# Altium PCB PCB1.PcbDoc
Units mil, origin at the board's own origin, x right, y up, seen from the top; angles counter-clockwise.
Board outline 7615 x 5380 mil, 2 copper layers (Top Layer, Bottom Layer); 49 components, 64 nets, 232 pads, 0 vias.
Unrouted connection lines stored in the file: 10.
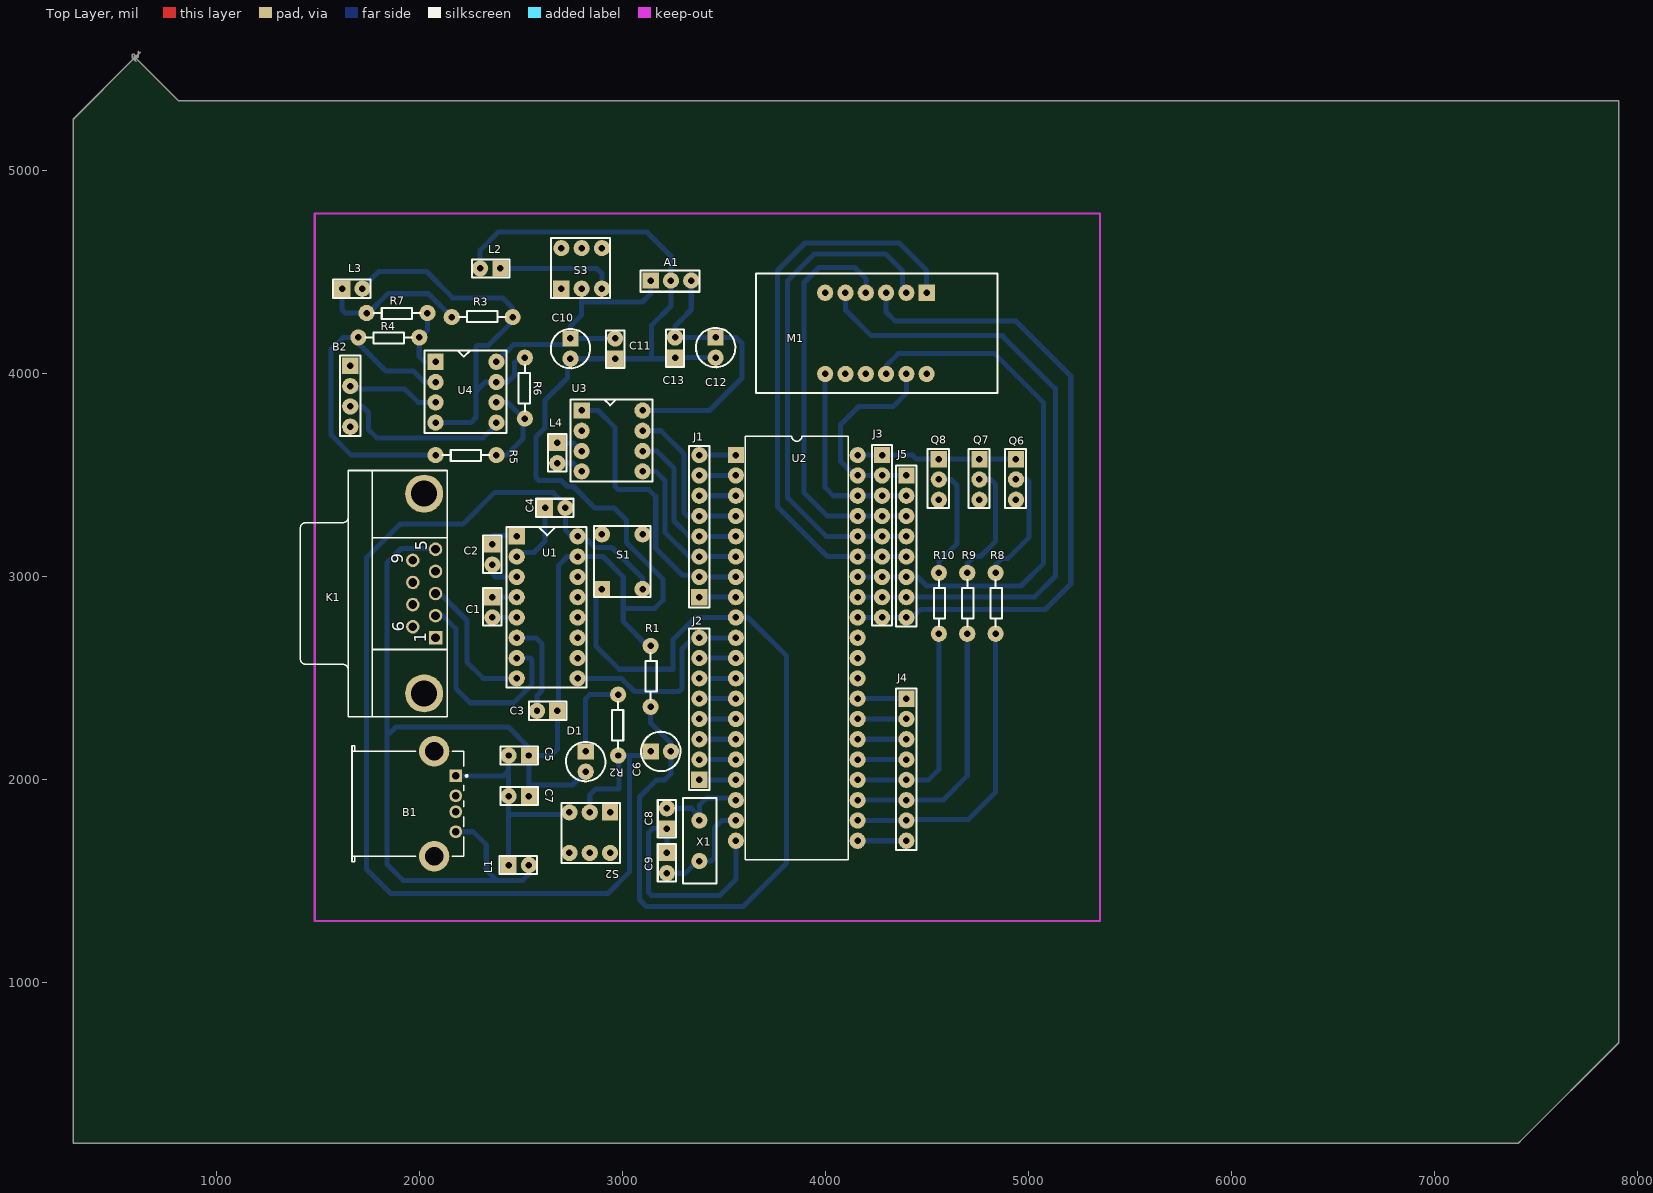
[diagram p0: Top Layer view]
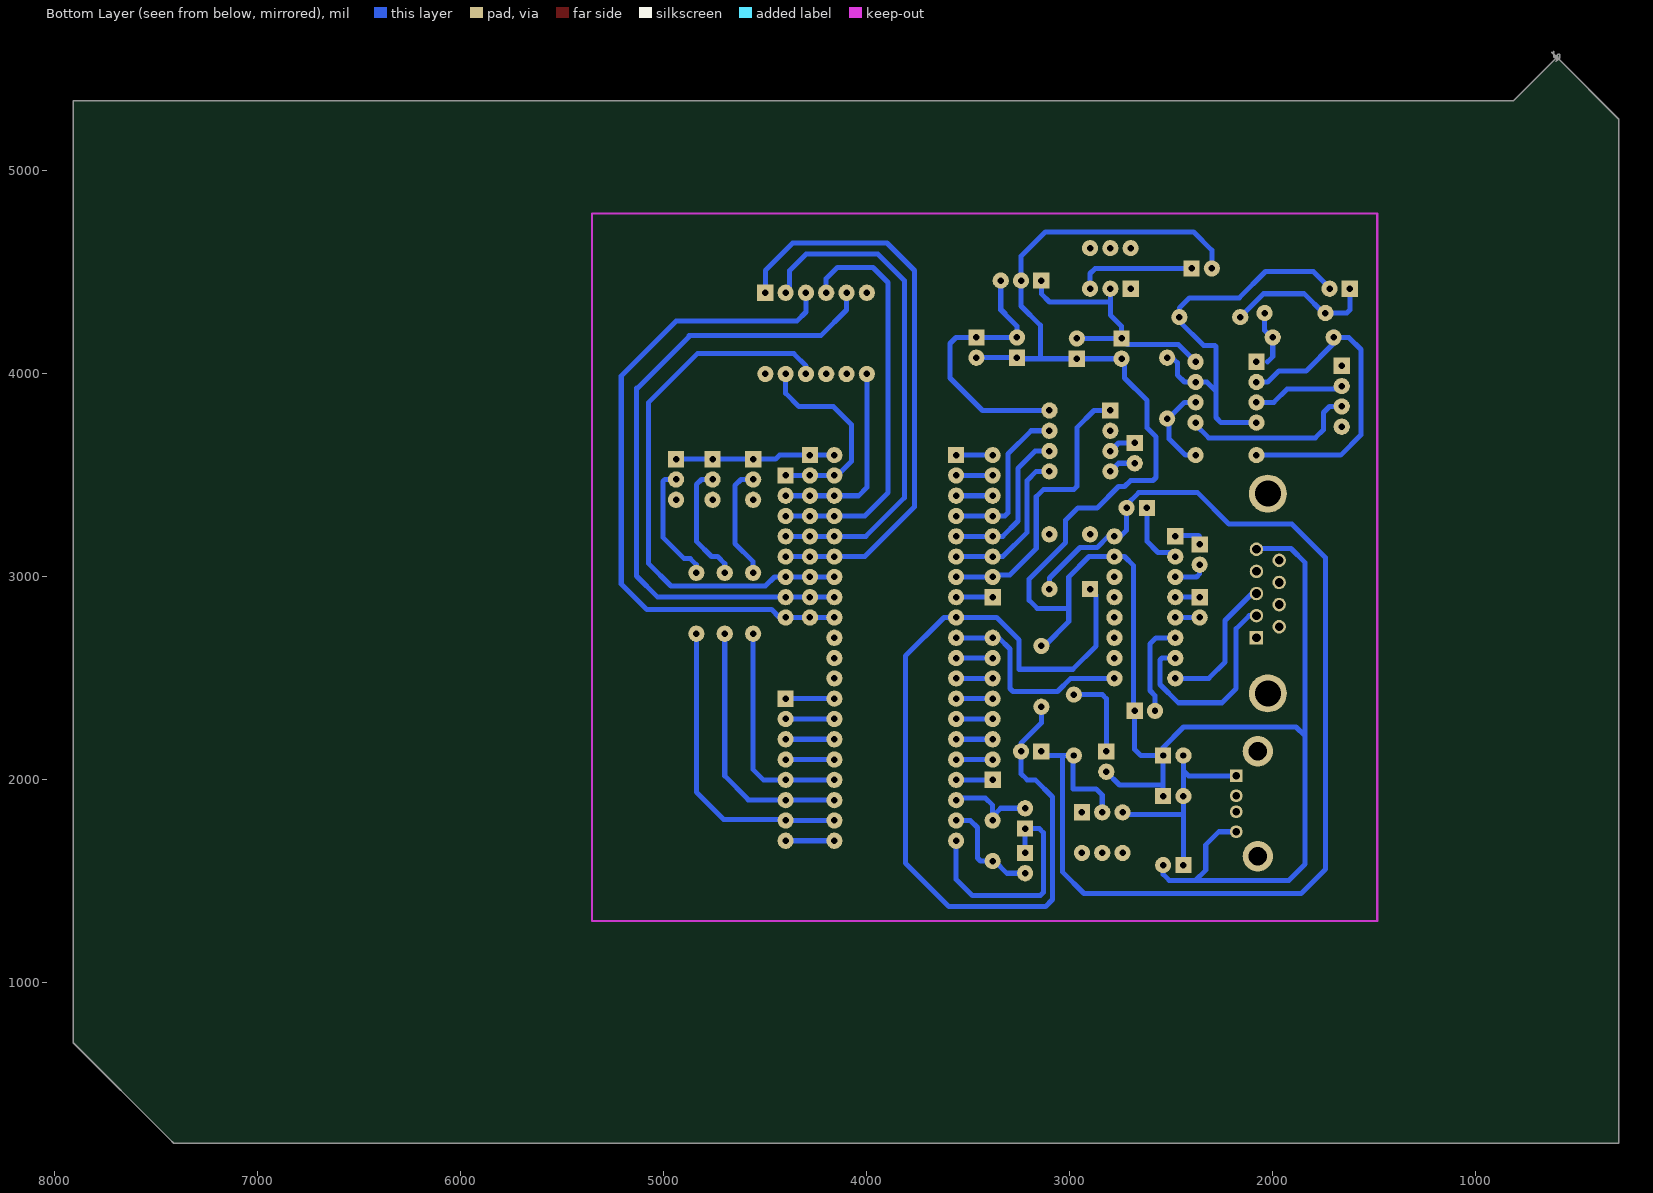
[diagram p1: Bottom Layer view, seen from below]

## Layer stack, top to bottom
Top Layer: signal copper 1.4
Dielectric: core 12.6, FR-4, Dk 4.8
Bottom Layer: signal copper 1.4

## Board outline
595,5565 815,5345 7910,5345 7910,705 7435,230 7415,210 295,210 295,5255 595,5555 595,5545 595,5555 625,5585 595,5555 605,5555 615,5565 615,5590 615,5575 595,5555 585,5555 585,5575 595,5575 600,5570 600,5560 595,5565 595,5550 605,5540 600,5545 600,5560 615,5560

## Design rules (kind name [scope] priority, off if disabled: settings)
Clearance [All] p1: gap=10
ComponentClearance [All] p1 off: gap=10 collisioncheckmode=3 verticalgap=10
PolygonConnect [All] p1: connectstyle=Relief reliefconductorwidth=10 reliefentries=4 polygonreliefangle="90 Angle"
RoutingVias [All] p1: holewidth=28 width=50 viastyle="Through Hole" minholewidth=28 minwidth=50 maxholewidth=28 maxwidth=50
SolderMaskExpansion [All] p1: expansion=4
TestPointUsage [All] p1: valid=0 allowmultiple=FALSE
Testpoint [All] p1: side=15 testpointundercomponent=TRUE minsize=40 maxsize=100 preferedsize=60 minholesize=0 maxholesize=40 preferedholesize=32 testpointgrid=1 style=1023 order=0-112345678
Width [All] p1: maxlimit=25 minlimit=25 preferedwidth=25
18 further rules are at their usual default settings.

## Components (designator, comment, footprint, x,y, rotation, side; value= is the part's Value field where it differs from the comment)
A1 "7805" P-3 3140,4460 r90 top
B1 "USB" USB 2180,2020 r180 top
B2 "传感器" P-4 1660,4040 r0 top
C1 "104" P-2 2360,2900 r0 top
C2 "104" P-2 2360,3160 r0 top
C3 "104" P-2 2680,2340 r270 top
C4 "104" P-2 2620,3340 r90 top
C5 "10uf" P-2 2540,2120 r270 top
C6 "10UF" P-2有源 3140,2140 r90 top
C7 "104" P-2 2540,1920 r270 top
C8 "30P" P-2 3220,1760 r180 top
C9 "30P" P-2 3220,1640 r0 top
C10 "22UF" P-2有源 2745,4175 r0 top
C11 "104" P-2 2965,4075 r180 top
C12 "22UF" P-2有源 3460,4180 r0 top
C13 "104" P-2 3260,4080 r180 top
D1 "HLMA-PH00-N0014" P-2有源 2820,2140 r0 top
J1 "P-8" P-8 3380,2900 r180 top
J2 "P-8" P-8 3380,2000 r180 top
J3 "排阻" P-9 4280,3600 r0 top
J4 "P-8" P-8 4400,2400 r0 top
J5 "P-8" P-8 4400,3500 r0 top
K1 "串口" 串口 2080,2700 r90 top
L1 "5v外接" P-2 2440,1580 r90 top
L2 "12v外接电源" P-2 2400,4520 r270 top
L3 "12v外接电源" P-2 1620,4420 r90 top
L4 "12v外接电源" P-2 2680,3660 r0 top
M1 "数码管" 数码管 4500,4400 r180 top
Q6 "8550" P-3 4940,3580 r0 top
Q7 "8550" P-3 4760,3580 r0 top
Q8 "8550" P-3 4560,3580 r0 top
R1 "10K" 电阻 3140,2660 r0 top
R2 "1k" 电阻 2980,2120 r180 top
R3 "10k" 电阻 2160,4280 r90 top
R4 "51k" 电阻 2000,4180 r270 top
R5 "330" 电阻 2380,3600 r270 top
R6 "51k" 电阻 2520,3780 r180 top
R7 "10k" 电阻 2040,4300 r270 top
R8 "4.7K" 电阻 4840,3020 r0 top
R9 "4.7K" 电阻 4700,3020 r0 top
R10 "4.7K" 电阻 4560,3020 r0 top
S1 "SW-PB" 按键 2900,2940 r0 top
S2 "SW-SPST" "LOCK KEY" 2940,1840 r180 top
S3 "SW-SPST" "LOCK KEY" 2700,4420 r0 top
U1 "MAX232" DIP-16 2480,3200 r0 top
U2 "89C52" 单片机 3560,3600 r180 top
U3 "ADC0832" DIP-8 2800,3820 r0 top
U4 "358" DIP-8 2080,4060 r0 top
X1 "晶振" 晶振 3380,1800 r0 top

## Footprints (in the part's own frame and the unit in brackets; to place one, negate y for a bottom-side part, rotate by r counter-clockwise, add the part's x,y. Pads: shape width x height; smd on the part's side, far side on the other; paste and mask are expansions set on the pad)
DIP-8 [mil]
  rect 80x80 hole 32: 1(0,0)
  round 80 hole 32: 2(0,-100) 3(0,-200) 4(0,-300) 5(300,-300) 6(300,-200) 7(300,-100) 8(300,0)
  silkscreen extent -55,-350 350,55
DIP-16 [mil]
  rect 80x80 hole 32: 1(0,0)
  round 80 hole 32: 2(0,-100) 3(0,-200) 4(0,-300) 5(0,-400) 6(0,-500) 7(0,-600) 8(0,-700) 9(300,-700) 10(300,-600) 11(300,-500) 12(300,-400) 13(300,-300) 14(300,-200) 15(300,-100) 16(300,0)
  silkscreen extent -50,-745 345,45
"LOCK KEY" [mil]
  round 80 hole 32: 1(200,0) 2(100,0) 4(200,200) 5(100,200) 6(0,200)
  rect 80x80 hole 32: 3(0,0)
  silkscreen extent -50,-45 240,250
P-2 [mil]
  rect 80x80 hole 32: 1(0,0)
  round 80 hole 32: 2(0,-100)
  silkscreen extent -45,-140 45,45
P-2有源 [mil]
  rect 80x80 hole 32: 1(0,0)
  round 80 hole 32: 2(0,-100)
  silkscreen extent -97,-147 97,47
P-3 [mil]
  rect 80x80 hole 32: 1(0,0)
  round 80 hole 32: 2(0,-100) 3(0,-200)
  silkscreen extent -55,-240 50,50
P-4 [mil]
  rect 80x80 hole 32: 1(0,0)
  round 80 hole 32: 2(0,-100) 3(0,-200) 4(0,-300)
  silkscreen extent -50,-345 50,50
P-8 [mil]
  rect 80x80 hole 32: 1(0,0)
  round 80 hole 32: 2(0,-100) 3(0,-200) 4(0,-300) 5(0,-400) 6(0,-500) 7(0,-600) 8(0,-700)
  silkscreen extent -50,-745 50,50
P-9 [mil]
  rect 80x80 hole 32: 1(0,0)
  round 80 hole 32: 2(0,-100) 3(0,-200) 4(0,-300) 5(0,-400) 6(0,-500) 7(0,-600) 8(0,-700) 9(0,-800)
  silkscreen extent -50,-840 50,50
USB [mm]
  rect 1.6x1.6 hole 0.92: 1(0,0)
  round 1.6 hole 0.92: 2(0,2.5) 3(0,4.5) 4(0,7)
  round 3.8 hole 2.3: 5(2.71,10.07) 6(2.71,-3.07)
  silkscreen extent -1.48,-3.75 12.99,10.75
串口 [mm]
  rect 1.69x1.69 hole 1.09: 1(0,0)
  round 1.69 hole 1.09: 2(2.77,0) 3(5.54,0) 4(8.31,0) 5(11.08,0) 6(1.385,2.84) 7(4.155,2.84) 8(6.925,2.84) 9(9.695,2.84)
  round 4.76 hole 3.26: 10(-6.955,1.42) 11(18.035,1.42)
  silkscreen extent -9.86,-1.48 20.94,16.92
单片机 [mil]
  rect 80x80 hole 32: 1(0,0)
  round 80 hole 32: 2(0,100) 3(0,200) 4(0,300) 5(0,400) 6(0,500) 7(0,600) 8(0,700) 9(0,800) 10(0,900) 11(0,1000) 12(0,1100) 13(0,1200) 14(0,1300) 15(0,1400) 16(0,1500) 17(0,1600) 18(0,1700) 19(0,1800) 20(0,1900) 21(-600,1900) 22(-600,1800) 23(-600,1700) 24(-600,1600) 25(-600,1500) 26(-600,1400) 27(-600,1300) 28(-600,1200) 29(-600,1100) 30(-600,1000) 31(-600,900) 32(-600,800) 33(-600,700) 34(-600,600) 35(-600,500) 36(-600,400) 37(-600,300) 38(-600,200) 39(-600,100) 40(-600,0)
  silkscreen extent -554,-93 -46,1993
按键 [mil]
  rect 80x80 hole 32: 1(0,0)
  round 80 hole 32: 2(200,0) 3(200,270) 4(0,270)
  silkscreen extent -40,-40 240,310
数码管 [mil]
  rect 80x80 hole 32: 1(0,0)
  round 80 hole 32: 2(100,0) 3(200,0) 4(300,0) 5(400,0) 6(500,0) 7(500,400) 8(400,400) 9(300,400) 10(200,400) 11(100,400) 12(0,400)
  silkscreen extent -350,-95 840,495
晶振 [mil]
  round 80 hole 32: 1(0,0) 2(0,-200)
  silkscreen extent -80,-310 85,110
电阻 [mil]
  round 80 hole 32: 1(0,0) 2(0,-300)
  silkscreen extent -25,-265 30,-35

## Part data
A1: library part P-3
B2: library part USB
C1 C2 C3 C4 C5 C7 C8 C9 C11 C13: library part Cap, "Capacitor"
C6 C10 C12: library part "Cap Pol1", "Polarized Capacitor (Radial)"
D1: "Subminiature High Performance AlInGaP Red/Orange LED Lamp"
J3: library part P-9
L1 L2 L3 L4: library part P-2
Q6 Q7 Q8: library part 2N3906, "PNP General Purpose Amplifier"
R1 R2 R3 R4 R5 R6 R7 R8 R9 R10: library part Res2, "Resistor"
S1: "Switch"
S2 S3: "Single-Pole, Single-Throw Switch"
U4: library part ADC0832

## Nets (pads, with @x,y where several pads share a name; then routed paths per layer and width w, separated by ;. In a path a pad name is that pad's centre, name@x,y a point inside that pad or via, vN(x,y) a via of type N, cw(c..) or ccw(c..) an arc to the next point about the centre after c; other vN are vias at no path point)
1: M1.12 Q8.3 | length 14.1
  Bottom Layer w25: M1.12@4490,3990 M1.12
2: M1.9 Q7.3
3: M1.8 Q6.3
+1: B2.2 U4.3 | length 453.1
  Bottom Layer w25: B2.2 1675,3925 1930,3925 1995,3860 U4.3
+2: B2.3 U4.5 | length 870.9
  Bottom Layer w25: B2.3 1720,3840 1750,3810 1750,3725 1790,3685 2315,3685 2380,3750 U4.5
A: J3.2 J5.1 M1.11 U2.39 | length 1017.3
  Bottom Layer w25: U2.39@4155,3490 4075,3570 4075,3750 4165,3840 4335,3840 4400,3905 M1.11 ; U2.39 J5.1
B: J3.3 J5.2 M1.7 U2.38 | length 976.6
  Bottom Layer w25: M1.7 4000,3440 4040,3400 J5.2
C: J3.4 J5.3 M1.4 U2.37 | length 2006.5
  Bottom Layer w25: M1.4 4200,4470 4145,4525 3970,4525 3895,4450 3895,3415 4010,3300 J5.3@4390,3300
D: J3.5 J5.4 M1.2 U2.36 | length 2504
  Bottom Layer w25: J5.4 4005,3200 3815,3390 3815,4460 3945,4590 4300,4590 4380,4510 4380,4420 M1.2
DP: J3.9 J5.8 M1.3 U2.32 | length 3249.8
  Bottom Layer w25: U2.32 J5.8 ; M1.3 4300,4305 4345,4260 4940,4260 5210,3990 5210,2965 5083.83,2838.83 4898.83,2838.83 4897.65,2840 4470,2840 J5.8@4430,2800
E: J3.6 J5.5 M1.1 U2.35 | length 2858.3
  Bottom Layer w25: J5.5 4010,3100 3765,3345 3765,4510 3900,4645 4365,4645 4500,4510 M1.1
F: J3.7 J5.6 M1.10 U2.34 | length 2713.5
  Bottom Layer w25: U2.34 4455,3000 4500,2955 4965,2955 5075,3065 5075,3860 4835,4100 4360,4100 4300,4040 M1.10
G: J3.8 J5.7 M1.5 U2.33 | length 3220.9
  Bottom Layer w25: M1.5 4100,4315 4225,4190 4875,4190 4875,4185 5130,3930 ; U2.33 5030,2900 5135,3005 5135,3930
GND: A1.2 B1.4 B2.4 C3.1 C5.1 C7.1 C8.1 C9.1 C10.2 C11.1 C12.2 C13.1 D1.2 K1.5 L1.2 L2.2 R1.1 U1.15 U2.20 | length 11479
  Bottom Layer w25: 1840,2215 1885,2260 2440,2260 2540,2160 C7.1 ; K1.5@2076.22,3140 1910,3140 1840,3070 1840,1585 1920,1505 2510,1505 2540,1535 L1.2 ; B1.4 2265.59,1744.41 2330,1680 2330,1555 2380,1505 ; L2.2 2300,4610 2390,4700 3120,4700 3240,4580 3240,4335 3145,4240 3145,4075 ; 2540,1975 2755,1975 D1.2 ; C5.1 2650,2120 2680,2150 C3.1 ; C3.1@2680,2335 2685,2340 2685,3055 2730,3100 2905,3100 3005,3000 3005,2780 3125,2660 R1.1 ; 3015,2845 3160,2845 3200,2885 3200,2990 3020,3170 3020,3280 2960,3340 2865,3340 2760,3445 2730,3445 2700,3475 2590,3475 2575,3490 2575,3690 2620,3735 2620,3870 2730,3980 2730,4060 C10.2 3255,4075 C13.1 C12.2 ; C9.1 C8.1 3150,1760 3130,1740 3130,1445 3145,1430 3480,1430 3560,1510 U2.20
NetB1_1: B1.1 C5.2 C7.2 L1.1 S2.1 | length 1100.4
  Bottom Layer w25: B1.1 2415,2020 2440,2045 ; L1.1 C5.2 ; 2440,1830 S2.1@2730,1830
NetC1_1: C1.1 U1.4 | length 120
  Bottom Layer w25: C1.1 U1.4
NetC1_2: C1.2 U1.5 | length 120
  Bottom Layer w25: C1.2 U1.5
NetC2_1: C2.1 U1.1 | length 157.1
  Bottom Layer w25: C2.1 2360,3200 2365,3205 U1.1@2475,3205
NetC2_2: C2.2 U1.3 | length 171.2
  Bottom Layer w25: C2.2 2360,3015 2375,3000 U1.3
NetC3_2: C3.2 U1.6 | length 477.8
  Bottom Layer w25: U1.6 2575,2700 2605,2670 2605,2440 2580,2415 C3.2
NetC4_1: C4.1 U1.2 | length 336.1
  Bottom Layer w25: U1.2 2500,3120 2565,3120 2620,3175 C4.1
NetC6_2: C6.2 R1.2 S1.1 U2.9 | length 4476.9
  Bottom Layer w25: S1.1 2870,2910 2870,2660 2985,2545 3250,2545 3250,2690 3360,2800 3620,2800 3810,2610 3810,1590 3595,1375 3120,1375 3085,1410 3085,1915 3170,2000 3210,2000 3240,2030 3240,2180 3140,2280 R1.2
NetC8_2: C8.2 U2.18 X1.1 | length 460.2
  Bottom Layer w25: C8.2 3340,1860 X1.1@3380,1820 ; X1.1 3380,1875 3415,1910 U2.18@3550,1910 ; U2.18@3540,1910 3550,1900 U2.18
NetC9_2: C9.2 U2.19 X1.2 | length 525.6
  Bottom Layer w25: C9.2 3310,1540 X1.2@3370,1600 ; X1.2 3440,1600 3455,1615 3455,1765 3490,1800 U2.19
NetD1_1: D1.1 R2.2 | length 428.3
  Bottom Layer w25: D1.1 2820,2400 2840,2420 R2.2
NetJ4_1: J4.1 U2.28 | length 240
  Bottom Layer w25: U2.28 J4.1
NetJ4_2: J4.2 U2.27 | length 240
  Bottom Layer w25: U2.27 J4.2
NetJ4_3: J4.3 U2.26 | length 240
  Bottom Layer w25: U2.26 J4.3
NetJ4_4: J4.4 U2.25 | length 240
  Bottom Layer w25: U2.25 J4.4
NetJ4_8: J4.8 U2.21 | length 247.1
  Bottom Layer w25: U2.21 J4.8 J4.8@4405,1695
NetK1_2: K1.2 U1.7 | length 1061.9
  Bottom Layer w25: K1.2 2115.94,2809.06 2180,2745 2180,2450 2250,2380 2465,2380 2555,2470 2555,2590 2545,2600 U1.7
NetK1_3: K1.3 U1.8 | length 693.3
  Bottom Layer w25: K1.3 2101.89,2918.11 2235,2785 2235,2580 2315,2500 U1.8
NetL2_1: L2.1 S3.1 | length 600.4
  Bottom Layer w25: L2.1@2385,4520 2875,4520 2900,4495 S3.1
NetL3_1: L3.1 R3.1 R7.2 | length 698.2
  Bottom Layer w25: L3.1 1620,4315 1635,4300 R7.2@1700,4300 ; R7.2 1750,4300 1845,4395 2045,4395 R3.1
NetL3_2: L3.2 R3.2 R6.2 U4.4 U4.7 | length 2053.3
  Bottom Layer w25: L3.2 1720,4425 1800,4505 2035,4505 2165,4375 2410,4375 2460,4325 2460,4260 2340,4140 2285,4140 2280,4135 2280,3785 2255,3760 U4.4 ; 2280,3915 2325,3960 2435,3960 2470,3995 2470,4055 2495,4080 R6.2
NetL4_1: L4.1 U3.3 | length 136.6
  Bottom Layer w25: L4.1 2760,3660 U3.3
NetL4_2: L4.2 U3.4 | length 136.6
  Bottom Layer w25: L4.2 2760,3560 U3.4
NetQ6_2: Q6.2 R8.1 | length 605.1
  Bottom Layer w25: R8.1 4840,3060 4870,3090 4900,3090 5005,3195 5005,3470 4995,3480 Q6.2
NetQ7_2: Q7.2 R9.1 | length 625.9
  Bottom Layer w25: R9.1@4725,3020 R9.1 4700,3065 4735,3100 4765,3100 4840,3175 4840,3455 4815,3480 Q7.2
NetQ8_2: Q8.2 R10.1 | length 569.7
  Bottom Layer w25: R10.1 4560,3075 4650,3165 4650,3450 4620,3480 Q8.2
NetR4_1: R4.1 R7.1 U4.1 | length 298.1
  Bottom Layer w25: 2025,4060 2000,4085 R4.1 2005,4180 2040,4215 R7.1 ; U4.1@2060,4080 U4.1
NetR4_2: R4.2 R5.2 U4.2 | length 1652.5
  Bottom Layer w25: R4.2 1625,4180 1565,4120 1565,3700 1665,3600 R5.2 ; R4.2@1700,4207.5 1700,4150 1835,4015 1970,4015 2025,3960 U4.2
NetR5_1: R5.1 R6.1 U4.6 | length 440.4
  Bottom Layer w25: R5.1 2430,3600 2510,3680 2510,3770 R6.1 2515,3780 2435,3860 U4.6
P10: J1.8 U2.1 | length 180
  Bottom Layer w25: J1.8 U2.1
P11: J1.7 U2.2 | length 180
  Bottom Layer w25: J1.7 U2.2
P12: J1.6 U2.3 | length 180
  Bottom Layer w25: J1.6 U2.3
P13: J1.5 U2.4 U3.7 | length 803.8
  Bottom Layer w25: U3.7 3190,3720 3305,3605 3305,3315 3320,3300 U2.4
P14: J1.4 U2.5 U3.6 | length 786.3
  Bottom Layer w25: U3.6 3170,3620 3255,3535 3255,3275 3330,3200 U2.5
P15: J1.3 U2.6 U3.5 | length 783.3
  Bottom Layer w25: U3.5 3165,3520 3210,3475 3210,3220 3330,3100 U2.6
P16: J1.2 U2.7 U3.1 | length 1418.9
  Bottom Layer w25: U3.1 2880,3820 2965,3735 2965,3445 2980,3430 3130,3430 3165,3395 3165,3140 3295,3010 3370,3010 J1.2 U2.7
P17: J1.1 U2.8 | length 180
  Bottom Layer w25: J1.1 U2.8
P21: J4.7 R8.2 U2.22 | length 1518
  Bottom Layer w25: U2.22 J4.7 4405,1805 4705,1805 4840,1940 R8.2
P22: J4.6 R9.2 U2.23 | length 1292.6
  Bottom Layer w25: U2.23 4585,1900 4585,1905 4700,2020 R9.2
P23: J4.5 R10.2 U2.24 | length 1090.7
  Bottom Layer w25: U2.24 4510,2000 4560,2050 R10.2
P30: J2.8 U1.9 U2.10 | length 1030.9
  Bottom Layer w25: U1.9 2995,2500 3060,2435 3280,2435 3295,2450 3295,2645 3350,2700 U2.10
P31: J2.7 U1.10 U2.11 | length 180
  Bottom Layer w25: J2.7 U2.11
P32: J2.6 U2.12 | length 180
  Bottom Layer w25: J2.6 U2.12
P33: J2.5 U2.13 | length 180
  Bottom Layer w25: J2.5 U2.13
P34: J2.4 U2.14 | length 180
  Bottom Layer w25: J2.4 U2.14
P35: J2.3 U2.15 | length 180
  Bottom Layer w25: J2.3 U2.15
P36: J2.2 U2.16 | length 180
  Bottom Layer w25: J2.2 U2.16
P37: J2.1 U2.17 | length 180
  Bottom Layer w25: J2.1 U2.17
VCC: A1.3 C4.2 C6.1 C12.1 C13.2 J3.1 Q6.1 Q7.1 Q8.1 R2.1 S1.2 S2.2 U1.16 U2.40 U3.8 | length 8060.3
  Bottom Layer w25: C4.2 2720,3230 U1.16@2750,3200 ; C4.2@2720,3355 2660,3415 2370,3415 2215,3260 1905,3260 1740,3095 1740,1560 1860,1440 2930,1440 3035,1545 3035,2120 ; U1.16 2810,3200 2865,3145 2950,3145 3100,2995 S1.2 ; S2.2@2850,1825 2840,1835 2840,1925 2870,1955 2985,1955 2985,2115 R2.1 C6.1@3120,2120 ; U3.8 3430,3820 3590,3980 3590,4150 3560,4180 C13.2 ; C6.1@3115,2120 3135,2140 C6.1 ; C13.2@3260,4170 3260,4235 3340,4315 ; 3320,4300 3340,4320 A1.3 A1.3@3345,4455 ; U2.40 4430,3600 4450,3580 Q6.1
VCC12: A1.1 B2.1 C10.1 C11.2 S3.2 U4.8 | length 1322
  Bottom Layer w25: U4.8 2465,4145 2715,4145 C10.1 ; 2800,4355 3100,4355 3140,4395 A1.1 ; S3.2 2800,4290 2745,4235 C10.1 ; C11.2 C10.1
pads on no net: B1.2 B1.3 B1.5 B1.6 K1.1 K1.4 K1.6 K1.7 K1.8 K1.9 K1.10 K1.11 M1.6 S1.3 S1.4 S2.3 S2.4 S2.5 S2.6 S3.3 S3.4 S3.5 S3.6 U1.11 U1.12 U1.13 U1.14 U2.29 U2.30 U2.31 U3.2

## Keep-outs
Keep-Out Layer:
  lines w10: 1485,1305 1485,4790 5355,4790 5355,1305 1485,1305

## Text inside footprints (layer, text, board x,y; h text height)
K1: Top Overlay "1" at 2035,2675 h59.06 r90; Top Overlay "5" at 2040,3130 h59.06 r90; Top Overlay "9" at 1920,3065 h59.06 r90; Top Overlay "6" at 1925,2730 h59.06 r90